# Altium PCB 2017_MADS.PcbDoc
Units mm, origin at the board's own origin, x right, y up, seen from the top; angles counter-clockwise.
Board outline 84.25 x 15.25 mm, 2 copper layers (Top Layer, Bottom Layer); 7 components, 6 nets, 24 pads, 0 vias.
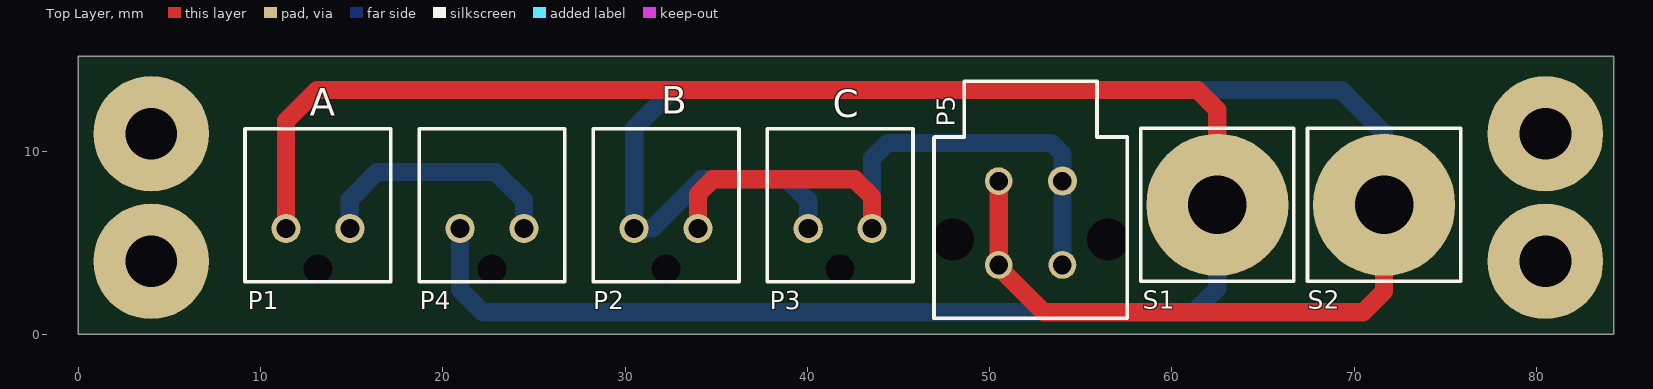
[diagram p0: Top Layer view]
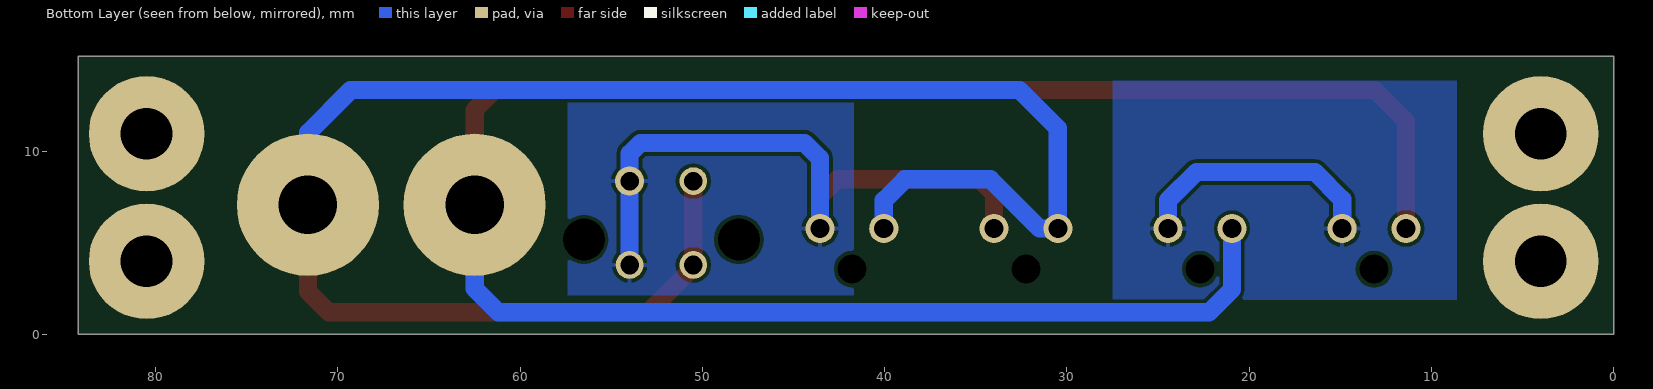
[diagram p1: Bottom Layer view, seen from below]
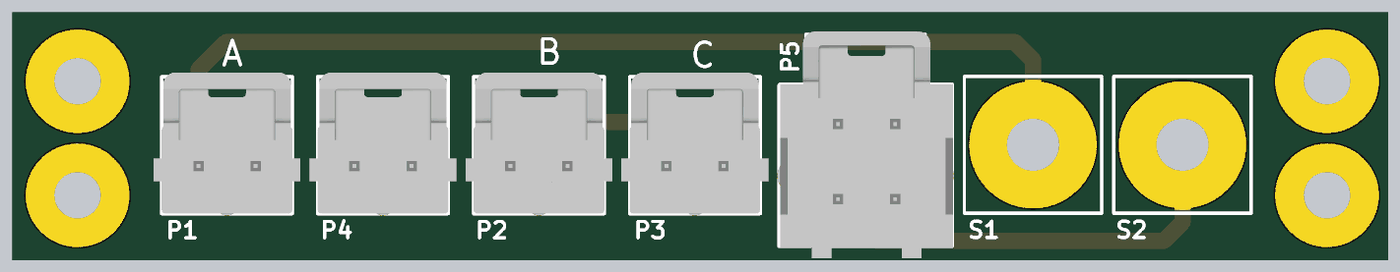
[diagram p2: 3D render of the assembled board from above, using the file's embedded part models]

## Layer stack, top to bottom
Top Solder: solder mask 0.0102, Solder Resist, Dk 3.5
Top Layer: signal copper 0.0356
Dielectric 1: dielectric 0.32, FR-4, Dk 4.8
Bottom Layer: signal copper 0.0356
Bottom Solder: solder mask 0.0102, Solder Resist, Dk 3.5

## Board outline
0,0 84.25,0 84.25,15.25 0,15.25

## Design rules (kind name [scope] priority, off if disabled: settings)
Clearance [All] p1: gap=0.15 except(0.2: Arc-Poly Track-Poly SMDPad-Poly THPad-Poly Via-Poly Fill-Poly Poly-Poly)
ComponentClearance [All] p1: gap=0.25 collisioncheckmode=3 verticalgap=0.25 showdistances=FALSE
DiffPairsRouting [All] p1: maxlimit=10 minlimit=0.2 mostfreqgap=0.25 toplayer_minwidth=0.2 toplayer_maxwidth=10 toplayer_prefwidth=0.25 bottomlayer_minwidth=0.2 bottomlayer_maxwidth=10 bottomlayer_prefwidth=0.25 maxuncoupledlength=12.7
Height [All] p1: minheight=0 maxheight=100 prefheight=0
HoleSize [All] p1: absolutevalues=TRUE maxlimit=10 minlimit=0.3 maxpercent=80.000 minpercent=20.000
HoleToHoleClearance [All] p1: gap=0.25 allowstackedmicrovias=TRUE
MinimumSolderMaskSliver [All] p1: minsoldermaskwidth=0.1
PlaneClearance [All] p1: clearance=0.5
PlaneConnect [All] p1: planeconnectstyle=Relief reliefexpansion=0.25 reliefentries=4 reliefconductorwidth=0.25 reliefairgap=0.25
PolygonConnect [All] p1: connectstyle=Relief reliefconductorwidth=0.25 reliefentries=4 polygonreliefangle="90 Angle" airgapwidth=0.2
RoutingCorners [All] p1: cornerstyle=45-Degree minsetback=2.5 maxsetback=2.5
RoutingVias [All] p1: holewidth=0.4 width=0.6 viastyle="Through Hole" minholewidth=0.3 minwidth=0.5 maxholewidth=1 maxwidth=1.5
SilkToSilkClearance [All] p1: silktosilkclearance=0.25
SilkToSolderMaskClearance [IsPad] p1: minsilkscreentomaskgap=0.1 clearancetoexposedcopper=TRUE
SolderMaskExpansion [All] p1: expansion=0.1
Width [All] p1: maxlimit=10 minlimit=0.2 preferedwidth=0.25 minimp=50.000000 maximp=50.000000 favimp=50.000000
19 further rules are at their usual default settings.

## Components (designator, comment, footprint, x,y, rotation, side; value= is the part's Value field where it differs from the comment)
P1 "Molex 1722861102" "Molex 1722861102" 9.15,2.87 r0 top
P2 "Molex 1722861102" "Molex 1722861102" 28.25,2.87 r0 top
P3 "Molex 1722861102" "Molex 1722861102" 37.801,2.87 r0 top
P4 "Molex 1722861102" "Molex 1722861102" 18.7,2.87 r0 top
P5 "Molex 1722991104" "Molex 1722991104" 52.251,8.55 r0 top
S1 "SW-SPST" "Screw Switch" 59.501,4.1 r0 top
S2 "SW-SPST" "Screw Switch" 68.651,4.1 r0 top

## Footprints (in the part's own frame and the unit in brackets; to place one, negate y for a bottom-side part, rotate by r counter-clockwise, add the part's x,y. Pads: shape width x height; smd on the part's side, far side on the other; paste and mask are expansions set on the pad)
"Molex 1722861102" [mm]
  round 1.6 hole 1.05: 1(2.25,2.93) 2(5.75,2.93)
  round 0 hole 1.6: ""(4,0.7)
  silkscreen extent 0,0 8,8.41, body extent -0.5,0 8.5,8.67, height 14.05
"Molex 1722991104" [mm]
  round 1.52 hole 1.02: 1(-1.75,-0.15) 3(-1.75,-4.75) 4(1.75,-4.75)
  round 1.6 hole 1.02: 2(1.75,-0.15)
  round 0 hole 2.3: ""(-4.25,-3.353) ""(4.25,-3.353)
  silkscreen extent -5.3,-7.68 5.3,5.33, body extent -5.24,-8.4 5.36,5.51, height 14.1
"Screw Switch" [mm]
  round 7.8 hole 3.2 unplated: 1(3,3)
  silkscreen extent -1.2,-1.2 7.2,7.2

## Part data
P1 P2 P3 P4: "ULTRAFIT CONN HDR 02CKT"
P5: "ULTRAFIT VERT TIN PLATED BLK"
S1 S2: "Single-Pole, Single-Throw Switch"

## Free pads (board coordinates)
  round 6.35 hole 2.845: ""(4,4) ""(4,11) ""(80.5,4) ""(80.5,11)

## Nets (pads, with @x,y where several pads share a name; then routed paths per layer and width w, separated by ;. In a path a pad name is that pad's centre, name@x,y a point inside that pad or via, vN(x,y) a via of type N, cw(c..) or ccw(c..) an arc to the next point about the centre after c; other vN are vias at no path point)
A+: P1.1 S1.1 | length 113.9
  Top Layer w1: P1.1 11.4,11.7 13.1,13.4 61.4,13.4 62.501,12.299 S1.1
  Bottom Layer w1: 20.95,5.8 20.95,2.45 22.2,1.2 61.2,1.2 62.501,2.501 S1.1
A-: P1.2 P4.2 | length 14
  Bottom Layer w1: P1.2 14.9,7.4 16.4,8.9 22.9,8.9 24.45,7.35 P4.2
B+: P2.1 P3.1 S2.1 | length 92.6
  Top Layer w1: 50.45,3.75 53,1.2 70.5,1.2 71.651,2.351 S2.1
  Bottom Layer w1: P3.1 40.051,7.349 38.9,8.5 34.2,8.5 31.5,5.8 P2.1 30.5,11.3 32.6,13.4 69.3,13.4 71.651,11.049 S2.1
B-: P2.2 P3.2 P5.2 P5.4 | length 35.2
  Top Layer w1: P2.2@34,5.5 P2.2 34,7.7 34.8,8.5 42.6,8.5 43.551,7.549 P3.2
  Bottom Layer w1: P3.2 43.551,9.651 44.399,10.499 53.401,10.499 54.001,9.899 P5.2 P5.4
NetP4_1: P4.1
NetP5_1: P5.1 P5.3 | length 4.6
  Top Layer w1: P5.3 P5.1
pads on no net: P1. P2. P3. P4. P5.

## Polygon pours and split planes (outlines as drawn)
B- on Bottom Layer "B-" (solid, pour order 10): 57.4,12.9 57.4,2.134 41.7,2.134 41.7,12.9
A- on Bottom Layer "A-" (solid, pour order 8): 27.5,13.9 27.5,1.9 8.6,1.9 8.6,13.9

## Silkscreen, mask and mechanical layers (free items; w line width, h text height)
Top Overlay:
  text "B" at 32,12.1 h1.5
  text "A" at 12.7,12 h1.5
  text "C" at 41.4,11.9 h1.5
Mechanical 1:
  the board outline again, w0.2